# Altium PCB LCD TEST BOART-A8.PcbDoc (part 2 of 2)
Units mm, origin at the board's own origin, x right, y up, seen from the top; angles counter-clockwise.
Board outline 152.4 x 101.6 mm, 2 copper layers (Top Layer, Bottom Layer); 153 components, 128 nets, 620 pads, 196 vias.
Unrouted connection lines stored in the file: 57.
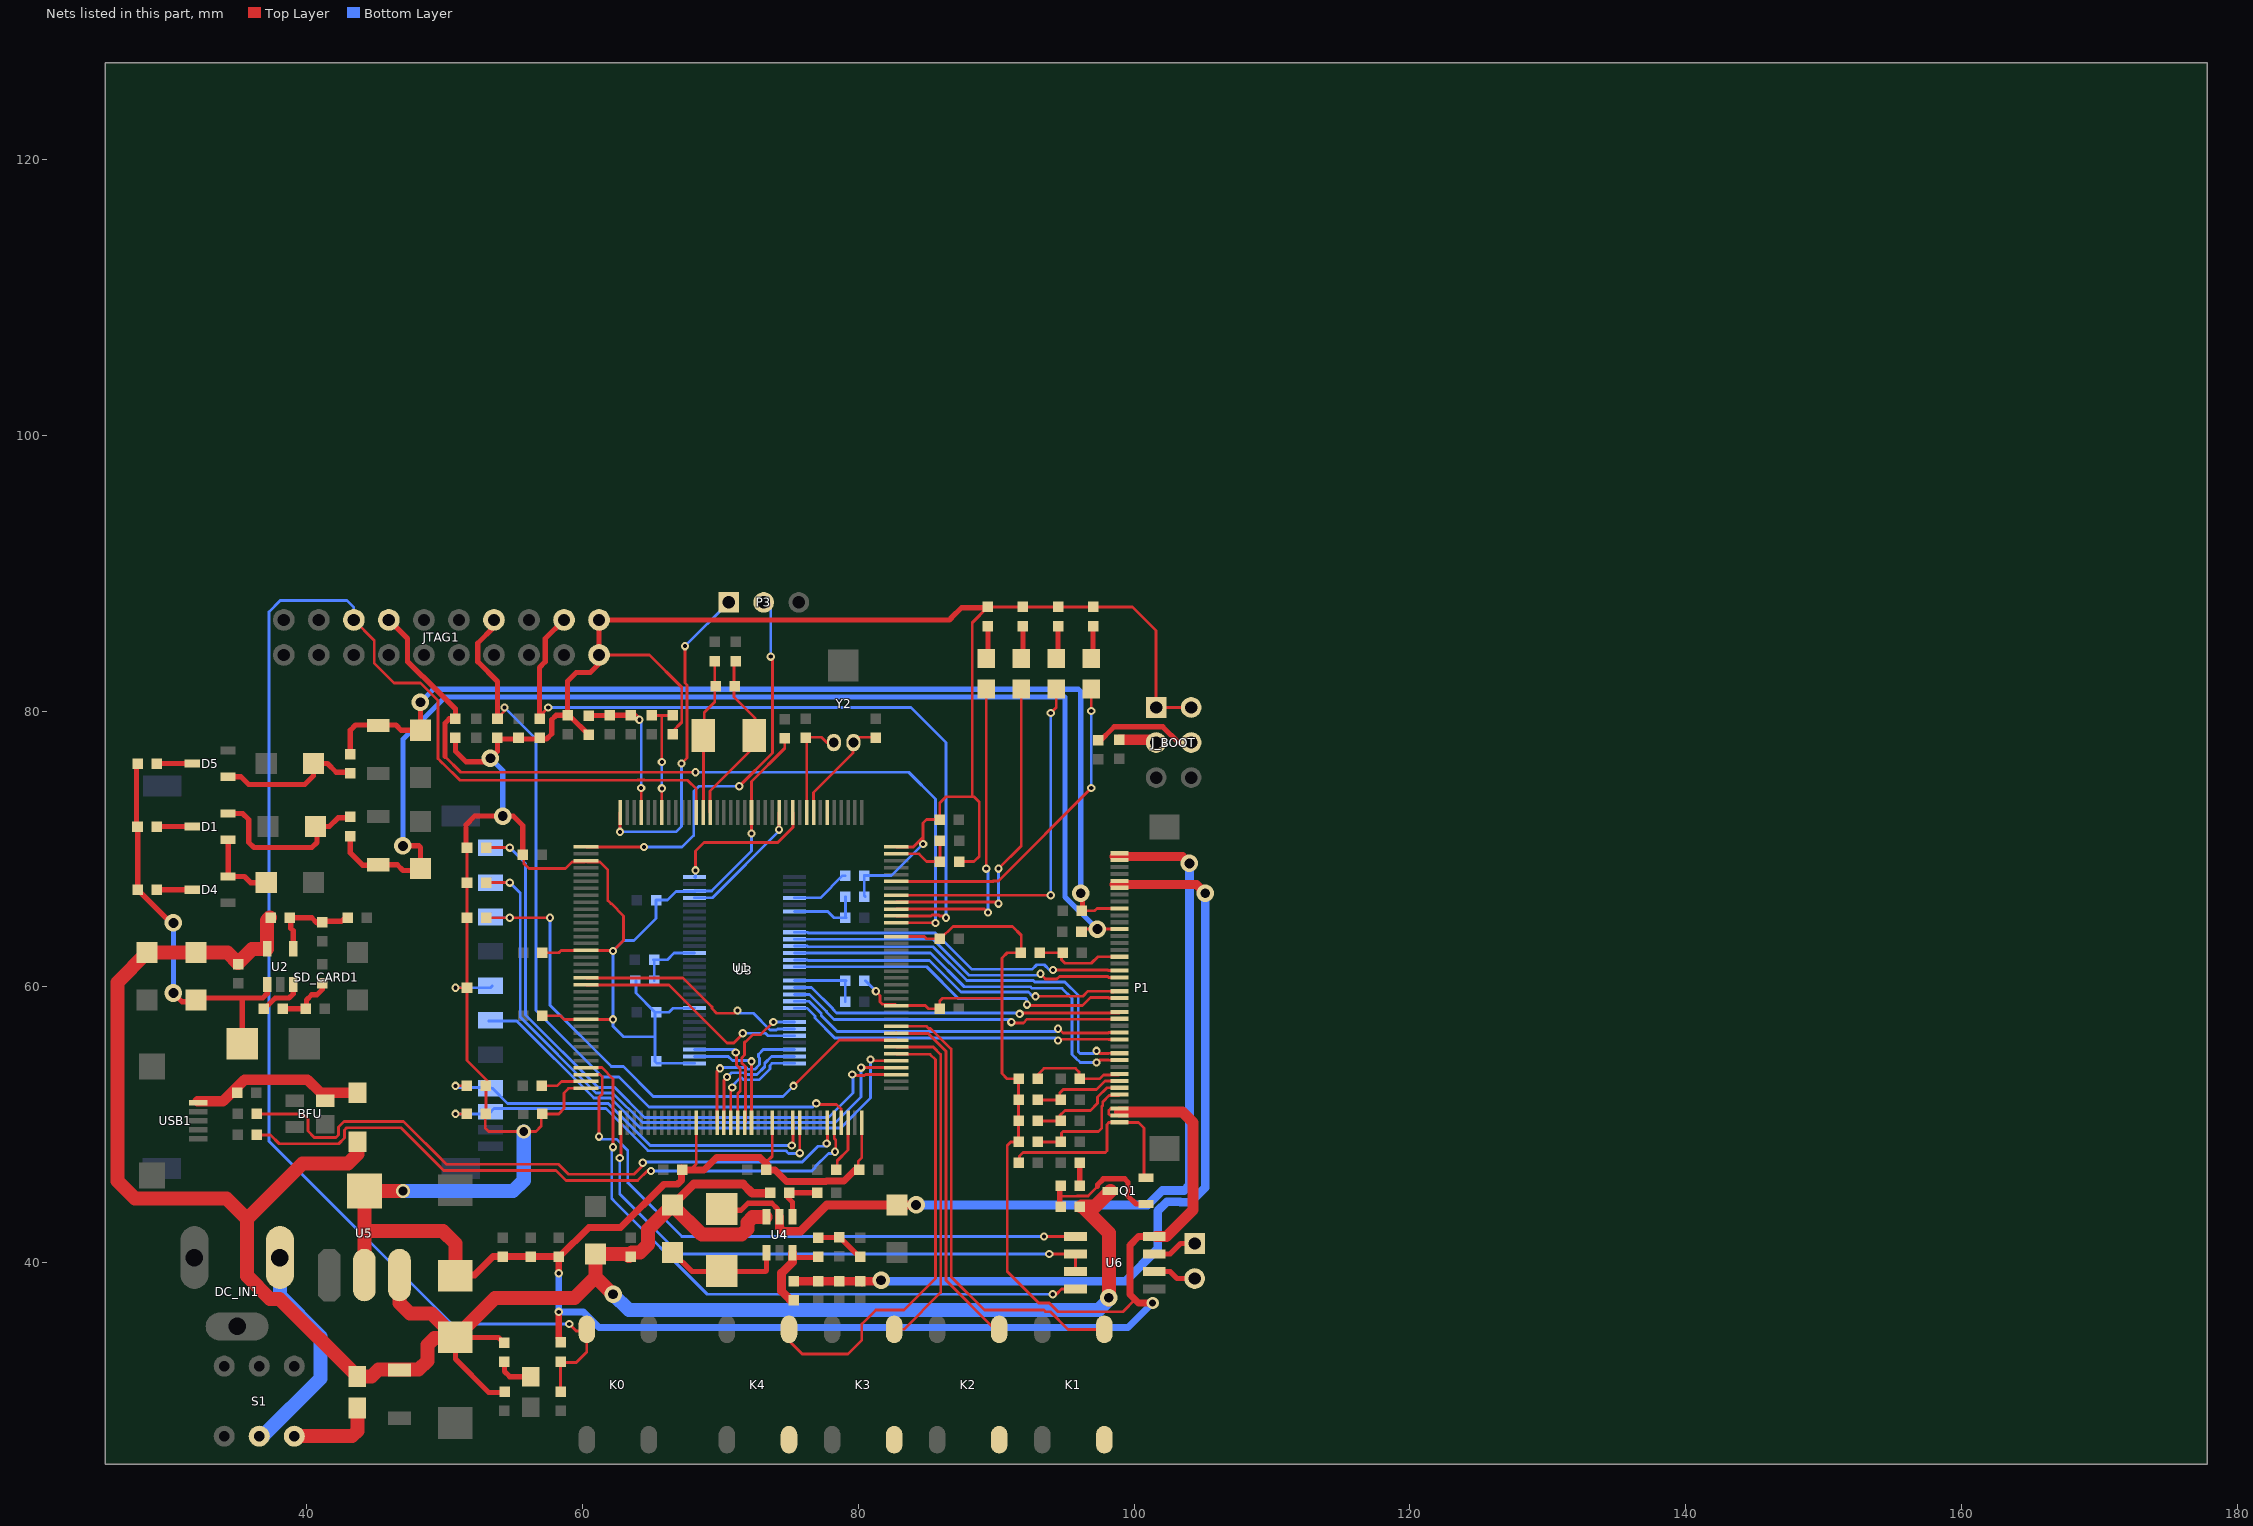
[diagram p2: the nets of this part, all layers, seen from the top]

## Via types
v1: diameter 0.6, hole 0.3, Top Layer to Bottom Layer, 177 vias
v2: diameter 1.27, hole 0.711, Top Layer to Bottom Layer, 14 vias
v3: diameter 0.8, hole 0.8, Top Layer to Bottom Layer, 2 vias
v4: diameter 1.016, hole 0.635, Top Layer to Bottom Layer, 2 vias
v5: diameter 0.889, hole 0.508, Top Layer to Bottom Layer, 1 vias

## Nets (pads, with @x,y where several pads share a name; then routed paths per layer and width w, separated by ;. In a path a pad name is that pad's centre, name@x,y a point inside that pad or via, vN(x,y) a via of type N, cw(c..) or ccw(c..) an arc to the next point about the centre after c; other vN are vias at no path point) (continued)
JTDO: JTAG1.13 R21.2 U1.133 | length 61.2
  Top Layer w0.203: 50.038,76.708 51.181,75.565 v1(68.199,75.565) ; U1.133@82.765,64.653 85.588,64.653 v1(85.598,64.643)
  Top Layer w0.381: JTAG1.13@45.974,86.614 47.333,85.255 47.333,83.585 48.406,82.512 48.455,82.512 50.802,80.165 R21.2@50.802,79.438 50.355,79.438 50.038,79.121 50.038,76.708
  Bottom Layer w0.203: v1(68.199,75.565) 83.662,75.565 85.598,73.629 v1(85.598,64.643)
JTMS: JTAG1.7 R20.2 U1.105 | length 58.4
  Top Layer w0.203: R20.2@53.848,79.502 53.85,79.504 54.356,80.01 v1(54.356,80.264) ; v1(76.962,51.562) 77.033,51.491 78.43,51.491 78.765,51.156 U1.105@78.765,50.153
  Top Layer w0.381: JTAG1.7@53.594,86.614 53.594,86.103 52.413,84.922 52.413,83.585 53.85,82.148 53.85,79.504 R20.2@53.85,79.438
  Bottom Layer w0.203: v1(54.356,80.264) 56.642,77.978 56.642,58.293 61.468,53.467 62.669,53.467 64.828,51.308 76.708,51.308 v1(76.962,51.562)
JTRST: JTAG1.3 R18.2 U1.134 | length 55
  Top Layer w0.203: R18.2@56.896,79.502 56.896,79.629 56.898,79.631 v1(57.531,80.264) ; U1.134@82.765,65.153 84.834,65.153 84.836,65.151 85.287,65.151 85.358,65.222 85.838,65.222 85.909,65.151 86.233,65.151 v1(86.36,65.024)
  Top Layer w0.381: R18.2@56.898,79.631 56.898,83.167 57.315,83.585 57.315,85.255 JTAG1.3@58.674,86.614
  Bottom Layer w0.203: v1(57.531,80.264) 83.82,80.264 86.36,77.724 86.36,73.406 86.36,73.279 v1(86.36,65.024)
KEY0: K1.2 U1.118 | length 33.9
  Top Layer w0.203: U1.118@82.765,57.153 84.949,57.153 85.103,56.999 85.241,56.999 86.741,55.499 86.741,38.989 89.154,36.576 93.472,36.576 93.591,36.457 93.941,36.457 95.22,35.178 K1.2@97.845,35.178
KEY1: K2.2 U1.117 | length 26
  Top Layer w0.203: U1.117@82.765,56.653 82.799,56.618 85.083,56.618 86.36,55.341 86.36,38.735 89.916,35.179 K2.2@90.17,35.179
KEY2: K3.2 U1.115 | length 25.1
  Top Layer w0.203: K3.2@82.677,35.179 83.312,35.179 85.979,37.846 85.979,55.118 85.444,55.653 U1.115@82.765,55.653
KEY3: K4.2 U1.114 | length 33.7
  Top Layer w0.203: K4.2@74.93,35.179 74.93,34.417 75.946,33.401 79.248,33.401 80.264,34.417 80.264,35.56 81.28,36.576 83.312,36.576 85.598,38.862 85.598,54.737 85.217,55.118 82.8,55.118 U1.114@82.765,55.153
L/R: P1.7 R28.1 R37.1 | length 6.9
  Top Layer w0.203: R28.1@92.964,51.816 R28.1@93.015,51.816 94.615,51.816 94.615,52.324 94.869,52.578 97.282,52.578 97.898,53.194 P1.7@98.959,53.194
LED0: DS1.2 U1.135 | length 22.8
  Top Layer w0.203: U1.135@82.765,65.653 89.16,65.653 v1(89.408,65.405) ; v1@89.279,68.582 DS1.2@89.279,81.609
  Bottom Layer w0.203: v1(89.408,65.405) v1@89.408,68.453
  other v1: 89.281,68.58
LED1: DS2.2 U1.136 | length 23.7
  Top Layer w0.203: U1.136@82.765,66.153 90.057,66.153 v1(90.17,66.04) ; v1(90.17,68.58) 91.819,70.229 DS2.2@91.819,81.609
  Bottom Layer w0.203: v1(90.17,66.04) v1(90.17,68.58)
LED2: DS3.2 U1.137 | length 26.4
  Top Layer w0.203: U1.137@82.765,66.653 v1(93.958,66.653) ; v1(93.958,79.861) 94.361,80.264 DS3.2@94.361,81.661
  Bottom Layer w0.203: v1(93.958,66.653) v1(93.958,79.861)
LED3: DS4.2 U1.139 | length 24.1
  Top Layer w0.203: U1.139@82.765,67.653 89.789,67.653 ; 89.789,67.691 90.17,67.691 v1(96.901,74.422) ; v1(96.899,80.012) DS4.2@96.899,81.609
  Bottom Layer w0.203: v1(96.899,80.012) 96.899,74.424 v1(96.901,74.422)
LED+: C44.1 D7.2 P1.39 P1.40 U4.5 | length 65
  Top Layer w0.381: D7.2@70.104,43.815 71.501,43.815 72.009,44.323 73.73,44.323 74.155,43.898 74.155,43.477 U4.5@74.295,43.337
  Top Layer w0.635: U4.5@74.295,43.337 74.295,42.545 74.548,42.292 75.82,42.292 77.724,44.196 C44.1@82.804,44.196 v2(84.201,44.196) ; 98.552,69.469 98.679,69.469 ; 98.959,69.469 103.505,69.469
  Bottom Layer w0.635: v2(84.201,44.196) 100.996,44.196 102.05,45.25 103.619,45.25 104.013,45.644 v2(104.013,68.961)
LED-: P1.35 P1.36 R49.2 R52.1 R53.1 R54.1 | length 62.2
  Top Layer w0.635: R49.2@75.313,38.672 R53.1@78.613,38.672 ; R53.1@78.613,38.659 R52.1@80.137,38.659 80.213,38.659 R52.1@80.264,38.608 ; R52.1@80.264,38.659 v2@81.585,38.659 ; 98.552,67.437 98.821,67.437 ; 98.959,67.437 104.521,67.437 v2(105.156,66.802)
  Bottom Layer w0.635: v2@81.724,38.672 99.377,38.672 101.725,41.019 101.725,43.775 102.387,44.437 103.323,44.437 ; 103.37,44.391 104.081,44.391 105.156,45.466 v2(105.156,66.802)
  other v2: 81.661,38.735
NetBFU_2: BFU.2 C52.2 D9.1 USB1.1 | length 12.6
  Top Layer w0.762: USB1.1@32.131,51.726 33.946,51.726 35.509,53.289 40.074,53.289 41.039,52.324 D9.1@43.688,52.324
NetC1_1: C1.1 U1.9 Y2.1 | length 7.7
  Top Layer w0.203: U1.9@76.265,72.653 76.265,78.04 76.2,78.105 77.343,78.105 77.724,77.724 Y2.1@78.232,77.724
NetC3_2: C3.2 R6.1 U1.24 Y1.1 | length 11.2
  Top Layer w0.203: U1.24@68.762,72.715 68.778,72.731 68.778,78.216 Y1.1@68.762,78.232 ; Y1.1@68.834,78.232 68.834,79.883 69.594,80.643 C3.2@69.594,83.629
NetC4_2: C4.2 R6.2 U1.23 Y1.2 | length 13.6
  Top Layer w0.203: U1.23@69.265,72.653 69.265,74.218 72.517,77.47 72.517,79.502 70.993,81.026 C4.2@70.993,83.439 ; Y1.2@72.462,77.415 Y1.2@72.462,78.232
NetC5_1: C5.1 U1.71 | length 3.3
  Top Layer w0.203: C5.1@57.074,52.832 58.166,52.832 58.487,53.153 U1.71@60.265,53.153
NetC6_1: C6.1 U1.106 | length 3.8
  Top Layer w0.203: C6.1@78.613,46.736 78.486,46.863 78.486,47.402 79.265,48.181 U1.106@79.265,50.153
NetC7_2: C7.2 C8.2 R8.1 U1.33 | length 10.8
  Top Layer w0.203: C7.2@63.5,79.756 63.881,79.756 64.135,79.502 v1(64.135,79.375) ; U1.33@64.265,72.653 v1(64.265,74.419)
  Top Layer w0.381: R8.1@60.452,79.68 C8.2@62.052,79.68 ; C8.2@61.978,79.692 C7.2@63.502,79.692 C7.2@63.563,79.692
  Bottom Layer w0.203: v1(64.135,79.375) 64.265,79.245 v1(64.265,74.419)
NetC24_1: C24.1 D1.2 R17.2 | length 12.8
  Top Layer w0.381: D1.2@34.32,72.578 35.372,72.578 35.814,72.136 35.814,70.485 36.195,70.104 40.386,70.104 40.767,70.485 C24.1@40.767,71.628 ; C24.1@40.64,71.755 C24.1@40.64,71.628 C24.1@40.767,71.628 ; C24.1@40.767,71.755 C24.1@40.767,71.628 ; R17.2@43.18,72.263 42.291,72.263 41.656,71.628 C24.1@40.767,71.628
NetC26_1: C26.1 D1.3 | length 2.6
  Top Layer w0.381: C26.1@29.134,71.628 D1.3@31.72,71.628 D1.3@31.75,71.628
NetC28_2: C28.2 L1.1 U3.34 | length 5.3
  Bottom Layer w0.203: U3.34@75.38,65.464 77.792,65.464 78.232,65.024 C28.2@78.994,65.024 ; L1.1@79.07,66.548 79.07,65.075 C28.2@79.121,65.024
NetC29_2: C29.2 L2.1 U3.44 | length 5.2
  Bottom Layer w0.203: U3.44@75.38,60.464 79.109,60.464 L2.1@79.121,60.452 ; C29.2@79.057,58.926 L2.1@79.057,60.389
NetC32_2: C32.2 D4.3 | length 2.6
  Top Layer w0.381: C32.2@29.146,67.054 31.748,67.054 D4.3@31.75,67.056
NetC33_1: C33.1 D1.1 D4.2 | length 5.6
  Top Layer w0.381: D1.1@34.29,70.612 34.32,70.582 D4.2@34.32,68.006 35.499,68.006 35.941,67.564 C33.1@37.084,67.564
NetC34_2: C34.2 R24.2 R32.2 U2.4 | length 6.9
  Top Layer w0.381: R24.2@38.798,65.022 R24.2@38.862,65.022 ; R24.2@38.862,65.024 R24.2@38.862,65.022 ; U2.4@39.05,62.768 39.05,64.074 38.862,64.262 R24.2@38.862,65.022 ; R32.2@43.053,65.024 42.799,65.024 42.545,64.77 41.148,64.77 41.021,64.643 40.767,64.643 40.388,65.022 R24.2@38.862,65.022
NetC37_2: C37.2 D5.1 R41.2 | length 10.5
  Top Layer w0.381: D5.1@34.32,75.25 35.24,75.25 35.814,74.676 39.878,74.676 40.513,75.311 C37.2@40.513,76.2 41.529,76.2 42.164,75.565 R41.2@43.18,75.565
NetC39_2: C39.2 D5.3 | length 2.6
  Top Layer w0.381: C39.2@29.146,76.198 31.748,76.198 D5.3@31.75,76.2
NetC51_2: C51.2 R55.1 R56.2 | length 3.8
  Top Layer w0.381: R55.1@77.089,41.834 78.689,41.834 80.137,40.386 R56.2@80.137,40.513
NetC53_1: C53.1 U1.8 Y2.2 | length 8.1
  Top Layer w0.203: U1.8@76.765,72.653 76.765,74.098 79.629,76.962 79.629,77.724 80.01,78.105 C53.1@81.28,78.105
NetD7_1: D7.1 L4.2 U4.1 | length 8.7
  Top Layer w0.381: L4.2@66.548,40.767 67.945,39.37 73.279,39.37 73.345,39.436 U4.1@73.345,40.737
NetDC_IN1_1: DC_IN1.1 S1.2 | length 16.2
  Bottom Layer w1.016: S1.2@36.576,27.432 36.83,27.432 41.021,31.623 41.021,34.671 38.077,37.615 DC_IN1.1@38.077,40.386
NetDS1_1: DS1.1 R12.2 | length 2.4
  Top Layer w0.381: DS1.1@89.281,83.82 89.406,83.945 R12.2@89.406,86.169
NetDS2_1: DS2.1 R14.2 | length 2.3
  Top Layer w0.381: DS2.1@91.694,83.947 91.946,84.199 R14.2@91.946,86.169
NetDS3_1: DS3.1 R15.2 | length 2.5
  Top Layer w0.381: DS3.1@94.234,83.82 94.486,84.072 R15.2@94.486,86.169
NetDS4_1: DS4.1 R16.2 | length 2.4
  Top Layer w0.381: DS4.1@96.901,83.82 97.026,83.945 R16.2@97.026,86.169
NetDS5_1: DS5.1 R60.2 | length 2.8
  Top Layer w0.381: R60.2@54.354,32.829 54.354,32.133 54.737,31.75 DS5.1@56.261,31.75
NetF1_1: F1.1 S1.3 | length 6.4
  Top Layer w1.016: S1.3@39.116,27.432 43.307,27.432 43.69,27.815 F1.1@43.69,29.464
NetJ_BOOT_3: J_BOOT.3 R43.2 | length 2.8
  Top Layer w0.762: R43.2@98.935,77.915 101.282,77.915 J_BOOT.3@101.6,77.597
NetJ_BOOT_4: J_BOOT.4 R44.1 | length 7.8
  Top Layer w0.381: R44.1@97.409,77.851 97.409,77.74 97.425,77.724 98.569,78.868 102.074,78.868 103.217,77.724 J_BOOT.4@104.14,77.724
NetP2_1: P2.1 U6.7 | length 3.2
  Top Layer w0.381: U6.7@101.473,40.64 102.616,40.64 103.378,41.402 P2.1@104.394,41.402
NetP2_2: P2.2 U6.6 | length 3.1
  Top Layer w0.381: U6.6@101.458,39.37 102.616,39.37 103.124,38.862 P2.2@104.394,38.862
NetQ1_1: Q1.1 R23.2 R26.1 | length 10.1
  Top Layer w0.203: 94.615,44.831 95.838,44.831 95.864,44.856 96.672,44.856 97.35,45.534
  Top Layer w0.381: R26.1@94.615,45.593 94.615,44.831 94.615,44.069 R23.2@94.805,43.878 ; R23.2@94.742,44.069 R23.2@94.818,44.145 ; 97.35,45.534 97.35,45.665 97.773,46.088 99.327,46.088 99.568,45.847 99.568,44.831 100.137,44.262 Q1.1@100.868,44.262
NetR10_1: R10.1 R11.1 U1.143 | length 4.9
  Top Layer w0.203: U1.143@82.765,69.653 84.398,69.653 84.963,69.088 R11.1@85.852,69.088 ; R11.1@85.928,69.037 R11.1@85.928,69.088 R10.1@85.928,70.612
NetR25_1: R25.1 R27.2 R33.2 | length 4.3
  Top Layer w0.381: R27.2@38.291,58.418 40.003,58.418 40.005,58.42 40.005,59.055 40.386,59.436 40.767,59.436 41.148,59.817 R25.1@41.148,60.274 R25.1@41.148,60.325
NetR26_2: R26.2 R34.1 | length 1.8
  Top Layer w0.381: R34.1@96.063,47.241 96.063,45.669 R26.2@96.139,45.593 ; R34.1@96.203,47.053 R34.1@96.266,47.117
NetR27_1: R27.1 U2.3 | length 3.2
  Top Layer w0.381: R27.1@36.957,58.42 37.719,59.182 37.735,59.182 37.746,59.193 38.735,59.193 39.05,59.508 U2.3@39.05,60.168
NetR47_2: R47.2 R50.2 U4.4 | length 4.1
  Top Layer w0.381: R47.2@74.93,45.085 74.93,44.704 75.245,44.389 U4.4@75.245,43.337 ; R47.2@74.993,45.083 R50.2@77.025,45.083 77.087,45.083 77.089,45.085 R50.2@76.962,45.085 ; U4.4@75.311,43.307 U4.4@75.311,43.337
NetR48_2: R48.2 R51.1 U3.17 | length 4.7
  Bottom Layer w0.203: R51.1@65.151,61.976 R51.1@65.202,61.976 R51.1@65.278,61.976 ; R48.2@65.215,60.454 65.215,61.912 R51.1@65.278,61.976 ; U3.17@68.13,62.464 66.655,62.464 66.167,61.976 R51.1@65.278,61.976
NetR49_1: R49.1 R55.2 U4.3 | length 6
  Top Layer w0.381: R49.1@75.097,37.338 75.224,37.211 R49.1@75.311,37.211 ; 75.596,40.386 R55.2@77.087,40.386
  Top Layer w0.635: U4.3@75.245,40.737 75.245,40.066 74.436,39.258 74.436,37.959 75.057,37.338 75.097,37.338 R49.1@75.311,37.338
NetR57_2: R57.2 U3.32 | length 4.3
  Bottom Layer w0.203: U3.32@75.38,66.464 77.259,66.464 78.865,68.07 R57.2@79.057,68.07
NRST: C40.2 JTAG1.15 K0.1@60.325,35.178 R36.1 U1.25 | length 116.5
  Top Layer w0.203: JTAG1.15@43.434,86.614 44.907,85.141 44.907,83.49 46.355,82.042 48.26,82.042 49.53,80.772 49.53,76.551 49.843,76.238 49.873,76.238 51.125,74.986 64.011,74.986 64.025,74.999 64.505,74.999 64.518,74.986 67.635,74.986 68.265,74.356 U1.25@68.265,72.653 ; C40.2@58.42,30.607 58.42,32.766 59.563,32.766 60.325,33.528 K0.1@60.325,35.052 ; v1(59.055,35.56) 59.563,35.052 K0.1@60.325,35.052 ; K0.1@59.817,35.56 K0.1@60.325,35.052 ; K0.1@60.325,35.178 K0.1@60.325,35.052
  Bottom Layer w0.203: JTAG1.15@43.434,86.614 43.434,87.503 42.926,88.011 38.1,88.011 37.287,87.198 37.287,87.056 37.287,48.819 50.546,35.56 v1(59.055,35.56)
PIN30: R45.2 R46.2 U1.30 | length 8.4
  Top Layer w0.203: R46.2@65.026,79.692 R45.2@66.484,79.692 ; U1.30@65.765,72.653 v1(65.765,74.401) ; v1(65.765,76.306) 65.765,79.608 65.786,79.629
  Bottom Layer w0.203: v1(65.765,74.401) v1(65.765,76.306)
R0: U1.56 U3.51 | length 17
  Top Layer w0.203: U1.56@60.265,60.653 67.306,60.653 69.398,58.561 69.398,58.434 69.737,58.095 71.049,58.095 v1(71.247,58.293)
  Bottom Layer w0.203: v1(71.247,58.293) 71.247,58.15 71.303,58.095 72.397,58.095 73.564,56.927 73.607,56.885 74.087,56.885 74.166,56.964 U3.51@75.38,56.964
R1: U1.57 U3.52 | length 17.3
  Top Layer w0.203: U1.57@60.265,60.153 66.282,60.153 70.499,55.936 70.979,55.936 71.628,56.585 v1(71.628,56.642)
  Bottom Layer w0.203: v1(71.628,56.642) 73.279,56.642 73.457,56.464 U3.52@75.38,56.464
R2: U1.87 U3.54 | length 10.6
  Top Layer w0.203: U1.87@69.765,50.153 69.765,53.89 v1(69.977,54.102)
  Bottom Layer w0.203: v1(69.977,54.102) 70.033,54.158 71.896,54.158 72.023,54.031 72.503,54.031 72.842,54.37 72.842,54.85 72.771,54.921 72.771,55.118 73.117,55.464 U3.54@75.38,55.464
R3: U1.88 U3.55 | length 9.2
  Top Layer w0.203: U1.88@70.265,50.153 70.265,53.247 v1(70.485,53.467)
  Bottom Layer w0.203: v1(70.485,53.467) 70.795,53.777 71.738,53.777 71.865,53.65 72.661,53.65 73.223,54.212 73.223,54.466 73.721,54.964 U3.55@75.38,54.964
R4: U1.89 U3.56 | length 8.1
  Top Layer w0.203: U1.89@70.765,50.153 70.765,52.604 v1(70.866,52.705)
  Bottom Layer w0.203: v1@70.802,52.768 71.43,53.396 71.58,53.396 71.707,53.269 72.819,53.269 73.604,54.054 73.604,54.308 73.76,54.464 U3.56@75.38,54.464
R5: U1.90 U3.3 | length 8.5
  Top Layer w0.203: v1(71.12,55.245) 71.12,55.372 71.176,55.316 71.176,54.339 71.445,54.069 71.445,52.465 71.265,52.284 U1.90@71.265,50.153
  Bottom Layer w0.203: U3.3@68.13,55.464 v1@71.028,55.464
R6: U1.91 U3.50 | length 10.3
  Top Layer w0.203: 71.755,56.007 71.765,56.007 ; U1.91@71.765,50.153 71.826,50.215 71.826,54.227 71.557,54.497 71.557,54.862 71.765,55.07 71.765,56.007 ; v1(73.847,57.464) 72.926,56.543 72.361,56.543 71.825,56.007 71.765,56.007
  Bottom Layer w0.203: v1(73.847,57.464) U3.50@75.38,57.464
R7: U1.92 U3.2 | length 8.7
  Top Layer w0.203: v1(72.263,54.61) 72.265,54.608 U1.92@72.265,50.153
  Bottom Layer w0.203: U3.2@68.13,54.964 70.582,54.964 70.88,54.666 72.207,54.666 v1(72.263,54.61)
RESET: C36.2 P1.5 R29.2 | length 8.8
  Top Layer w0.203: R29.2@92.964,48.768 94.742,48.768 94.742,49.403 94.869,49.53 97.409,49.53 97.663,49.784 97.663,51.347 97.733,51.417 97.733,51.663 98.193,52.123 98.888,52.123 P1.5@98.959,52.194
RS232_RX: P3.2 U1.37 | length 29.4
  Top Layer w0.203: U1.37@60.265,70.153 v1(64.467,70.153) ; v1(71.374,74.549) 73.787,76.962 73.787,83.82 v1(73.66,83.947)
  Bottom Layer w0.203: v1(64.467,70.153) 67.232,70.153 68.072,70.993 68.072,74.168 68.453,74.549 v1(71.374,74.549) ; P3.2@73.152,87.884 73.66,87.376 v1(73.66,83.947)
RS232_TX: P3.1 U1.36 | length 23.8
  Top Layer w0.203: v1(62.738,71.247) U1.36@62.738,72.644 ; v1(67.183,76.2) 67.591,76.608 67.591,81.888 67.437,82.042 v1(67.437,84.709)
  Bottom Layer w0.203: v1(62.738,71.247) 66.802,71.247 67.183,71.628 v1(67.183,76.2) ; v1(67.437,84.709) P3.1@70.612,87.884
RS485_RE: U1.73 U6.2 U6.3 | length 41.1
  Top Layer w0.203: v1(62.711,47.598) v1@62.711,47.625 ; v1@62.738,47.625 62.809,47.696 62.809,50.108 U1.73@62.765,50.153 ; v1(93.853,40.64) U6.2@95.758,40.64 U6.3@95.758,39.37
  Bottom Layer w0.203: v1@62.711,47.371 62.711,44.985 67.056,40.64 v1(93.853,40.64)
RS485_RX: U1.69 U6.4 | length 47.8
  Top Layer w0.203: U1.69@60.265,54.153 61.417,54.153 62.23,53.34 v1(62.23,48.387) v1@62.357,48.387 ; v1(94.107,37.719) 94.361,37.719 94.742,38.1 U6.4@95.758,38.1
  Bottom Layer w0.203: 62.215,44.562 69.057,37.719 v1(94.107,37.719) ; 62.23,44.577 62.132,44.675 62.132,48.289 v1(62.23,48.387)
RS485_TX: U1.70 U6.1 | length 44.6
  Top Layer w0.203: U1.70@60.265,53.653 61.282,53.653 61.468,53.467 61.444,53.443 61.444,52.247 61.214,52.017 v1(61.214,49.149) ; v1(93.472,41.91) U6.1@95.758,41.91
  Bottom Layer w0.203: v1(61.214,49.149) 61.397,48.966 62.47,48.966 63.29,48.146 63.29,47.498 63.29,47.358 63.29,45.803 63.373,45.72 ; 63.389,45.736 67.214,41.91 v1(93.472,41.91)
RSVD: U1.13 U3.25 | length 9.5
  Top Layer w0.203: v1(74.265,71.404) U1.13@74.265,72.653
  Bottom Layer w0.203: U3.25@68.13,66.464 69.416,66.464 74.295,71.343 v1@74.295,71.374 ; v1@74.265,71.374 v1(74.265,71.404)
RXCLKIN_N: P1.10 U3.40 | length 29.3
  Top Layer w0.203: v1(97.282,54.517) 97.48,54.715 98.15,54.715 98.171,54.694 P1.10@98.959,54.694
  Bottom Layer w0.203: U3.40@75.38,62.464 85.237,62.464 87.688,60.013 92.5,60.013 92.611,59.902 94.784,59.902 95.504,59.182 95.504,55.118 95.758,54.864 96.105,54.517 v1(97.282,54.517)
RXCLKIN_P: P1.11 U3.39 | length 29.3
  Top Layer w0.203: v1(97.282,55.371) 97.48,55.173 98.15,55.173 98.171,55.194 P1.11@98.959,55.194
  Bottom Layer w0.203: U3.39@75.38,62.964 76.327,62.964 76.37,62.921 85.426,62.921 87.877,60.47 92.689,60.47 92.801,60.359 94.974,60.359 95.961,59.371 95.961,55.307 96.081,55.187 97.098,55.187 v1(97.282,55.371)
RXIN0_N: P1.13 U3.48 | length 24.7
  Top Layer w0.203: v1(94.488,56.113) 94.59,56.215 98.15,56.215 98.171,56.194 P1.13@98.959,56.194
  Bottom Layer w0.203: U3.48@75.38,58.464 76.289,58.464 76.865,57.888 76.865,57.743 78.297,56.312 94.29,56.312 v1(94.488,56.113)
RXIN0_P: P1.14 U3.47 | length 24.8
  Top Layer w0.203: v1(94.488,56.967) 94.561,56.967 94.856,56.673 98.15,56.673 98.171,56.694 P1.14@98.959,56.694
  Bottom Layer w0.203: U3.47@75.38,58.964 76.436,58.964 77.323,58.077 77.323,57.932 78.486,56.769 94.29,56.769 v1(94.488,56.967)
RXIN1_N: P1.16 U3.46 | length 24.7
  Top Layer w0.203: v1(91.103,57.448) 91.155,57.397 91.979,57.397 92.248,57.666 98.931,57.666 P1.16@98.959,57.694
  Bottom Layer w0.203: U3.46@75.38,59.464 76.474,59.464 77.704,58.235 77.704,58.196 78.248,57.651 80.144,57.651 91.108,57.651 91.108,57.453 v1(91.103,57.448)
RXIN1_P: P1.17 U3.45 | length 24.4
  Top Layer w0.203: v1(91.707,58.052) 91.778,58.123 P1.17@98.933,58.123
  Bottom Layer w0.203: U3.45@75.38,59.964 76.621,59.964 78.161,58.424 78.161,58.385 78.438,58.108 80.333,58.108 91.453,58.108 91.509,58.052 v1(91.707,58.052)
RXIN2_N: P1.19 U3.42 | length 25.2
  Top Layer w0.203: v1(92.246,58.718) 92.298,58.667 96.27,58.667 96.843,59.24 98.125,59.24 98.171,59.194 P1.19@98.959,59.194
  Bottom Layer w0.203: U3.42@75.38,61.464 84.967,61.464 87.256,59.175 92.153,59.175 92.195,59.133 92.195,59.051 92.288,58.958 92.288,58.76 v1(92.246,58.718)
RXIN2_P: P1.20 U3.41 | length 25
  Top Layer w0.203: v1(92.85,59.322) 96.279,59.322 96.654,59.697 98.315,59.697 98.388,59.623 98.473,59.623 98.402,59.694 P1.20@98.959,59.694
  Bottom Layer w0.203: U3.41@75.38,61.964 76.327,61.964 76.37,61.921 85.156,61.921 87.445,59.632 92.342,59.632 92.652,59.322 v1(92.85,59.322)
RXIN3_N: P1.22 U3.38 | length 25
  Top Layer w0.203: v1(93.218,60.96) 93.218,60.922 93.568,60.572 94.392,60.572 94.59,60.77 98.095,60.77 98.171,60.694 P1.22@98.959,60.694
  Bottom Layer w0.203: U3.38@75.38,63.464 85.422,63.464 88.035,60.851 93.109,60.851 v1(93.218,60.96)
RXIN3_P: P1.23 U3.37 | length 25
  Top Layer w0.203: v1(94.12,61.227) 98.095,61.227 98.15,61.173 98.171,61.194 P1.23@98.959,61.194
  Bottom Layer w0.203: U3.37@75.38,63.964 76.327,63.964 76.37,63.921 85.612,63.921 88.254,61.279 92.61,61.279 92.946,61.616 93.49,61.616 93.878,61.227 v1(94.12,61.227)
SDIO_CMD: R3.2 SD_CARD1.2 U1.116 | length 41.9
  Top Layer w0.203: R3.2@53.023,65.022 v1(54.735,65.022) ; v1@54.737,65.024 v1(57.658,65.024) ; v1(75.311,52.832) 78.632,56.153 U1.116@82.765,56.153
  Bottom Layer w0.203: SD_CARD1.2@53.34,65.024 54.734,65.024 v1(54.735,65.022) ; v1(57.658,65.024) 57.658,58.674 62.103,54.229 62.985,54.229 65.144,52.07 74.549,52.07 v1(75.311,52.832)
SDIO_D0: R4.2 SD_CARD1.7 U1.98 | length 28.8
  Top Layer w0.203: v1(50.802,52.834) R4.2@51.625,52.834 ; v1(75.184,48.514) 75.311,48.514 75.265,48.56 U1.98@75.265,50.153
  Bottom Layer w0.203: v1(50.802,52.834) 50.93,52.705 SD_CARD1.7@53.34,52.705 ; SD_CARD1.7@53.331,52.656 53.482,52.656 54.576,51.562 59.628,51.562 61.88,51.562 64.928,48.514 v1(75.184,48.514)
SDIO_D1: R5.2 SD_CARD1.8 U1.99 | length 29.5
  Top Layer w0.203: v1(50.802,50.802) R5.2@51.625,50.802 ; v1(75.765,47.952) U1.99@75.765,50.153
  Bottom Layer w0.203: v1(50.802,50.802) 53.215,50.802 53.594,51.181 60.356,51.181 60.452,51.181 61.722,51.181 64.77,48.133 74.746,48.133 74.944,47.935 75.748,47.935 v1(75.765,47.952)
SDIO_D2: R1.2 SD_CARD1.9 U1.111 | length 47.9
  Top Layer w0.203: R1.2@53.023,70.102 54.735,70.102 v1(54.737,70.104) ; v1(79.57,53.653) 79.649,53.574 80.453,53.574 80.532,53.653 U1.111@82.765,53.653
  Bottom Layer w0.203: SD_CARD1.9@53.34,70.104 v1(54.737,70.104) 55.88,68.961 55.88,57.977 61.152,52.705 62.353,52.705 64.512,50.546 77.851,50.546 79.629,52.324 v1@79.629,53.594 ; v1@79.57,53.594 v1(79.57,53.653)
SDIO_D3: R2.2 SD_CARD1.1 U1.112 | length 46.4
  Top Layer w0.203: R2.2@53.086,67.564 v1(54.737,67.564) ; v1(80.213,54.153) U1.112@82.765,54.153
  Bottom Layer w0.203: SD_CARD1.1@53.34,67.564 v1(54.737,67.564) 55.499,66.802 55.499,57.82 60.995,52.324 62.195,52.324 64.354,50.165 78.359,50.165 80.213,52.019 v1(80.213,54.153)
SDIO_SCK: SD_CARD1.5 U1.113 | length 36.5
  Top Layer w0.203: v1(80.899,54.737) 80.983,54.653 U1.113@82.765,54.653
  Bottom Layer w0.203: SD_CARD1.5@53.213,57.531 55.245,57.531 60.833,51.943 62.038,51.943 64.197,49.784 78.74,49.784 80.899,51.943 v1(80.899,54.737)
SELB: P1.25 R40.2 R42.1 | length 6.7
  Top Layer w0.203: R40.2@93.154,62.482 R42.1@94.742,62.482 ; R42.1@94.742,62.484 R42.1@94.742,62.482 ; R42.1@94.869,62.484 94.867,62.482 R42.1@94.742,62.482 ; P1.25@98.959,62.194 97.373,62.194 96.901,61.722 94.996,61.722 94.742,61.976 R42.1@94.742,62.482
STBYB: P1.8 R31.1 R39.2 | length 7.2
  Top Layer w0.203: R31.1@93.091,53.34 92.964,53.467 92.964,53.594 93.472,54.102 95.758,54.102 96.012,53.848 96.012,53.402 R39.2@96.075,53.338 ; R39.2@96.139,53.34 97.505,53.34 97.789,53.623 98.888,53.623 P1.8@98.959,53.694
SW: C26.2 C32.1 C39.1 D3.1 L3.2 U2.1 | length 29.1
  Top Layer w0.381: C39.1@27.686,76.2 27.686,71.628 27.762,71.552 C32.1@27.762,67.056 30.175,64.643 v2(30.353,64.643) ; v2(30.353,59.563) 30.988,58.928 31.877,58.928 L3.2@32.004,59.055 32.144,59.195 36.83,59.195 37.15,59.515 U2.1@37.15,60.168 ; 35.306,59.182 35.342,59.146 D3.1@35.342,55.88
  Bottom Layer w0.381: v2(30.353,59.563) v2(30.353,64.643)
U/D: P1.6 R30.2 R38.1 | length 7.4
  Top Layer w0.203: R30.2@93.091,50.292 R38.1@94.615,50.292 ; R38.1@94.691,50.292 R38.1@94.615,50.292 ; P1.6@98.959,52.694 98.033,52.694 97.352,52.013 97.352,51.574 96.831,51.054 94.996,51.054 94.615,50.673 R38.1@94.615,50.292
USB_D_N: R58.2 U1.103 | length 47.6
  Top Layer w0.203: R58.2@36.386,50.798 39.731,50.798 40.113,50.416 40.113,49.55 40.568,49.096 42.15,49.096 42.313,49.259 42.313,49.835 42.733,50.255 47.039,50.255 50.143,47.151 58.271,47.151 58.997,46.424 63.741,46.424 64.376,47.059 v1(64.376,47.257) ; v1(77.711,48.654) 77.765,48.708 U1.103@77.765,50.153
  Bottom Layer w0.203: v1(64.376,47.257) 64.427,47.309 75.941,47.309 77.088,48.456 77.711,48.456 v1(77.711,48.654)
USB_D_P: R59.2 U1.104 | length 47.5
  Top Layer w0.203: R59.2@36.386,49.274 37.392,49.274 38.028,48.638 42.339,48.638 42.759,49.058 42.759,49.634 42.922,49.797 46.85,49.797 49.954,46.693 58.082,46.693 58.808,45.967 64.013,45.967 64.74,46.695 64.938,46.695 v1(64.98,46.653) ; U1.104@78.265,50.153 78.265,49.028 78.366,48.926 78.366,48.383
  Bottom Layer w0.203: v1(64.98,46.653) 76.637,46.653 76.891,46.907 76.891,46.976 77.851,47.937 78.29,47.937 78.359,48.006 v1@78.359,48.133
  other v1: 78.315,48.05
VBAT: U1.6
VCC5V: C30.1 C31.2 C42.1 C43.2 C45.1 C47.2 D8.2 D9.2 F1.2 L3.1 L4.1 Q1.3 R23.1 R24.1 R47.1 R60.1 U2.5 U4.6 U5.3 | length 178.5
  Top Layer w0.381: C47.2@54.356,30.607 53.213,30.607 50.8,33.02 50.8,34.544 C45.1@50.8,34.596 53.923,34.596 R60.1@54.356,34.163
  Top Layer w0.635: L4.1@66.548,44.196 68.072,45.72 71.646,45.72 72.315,45.052 73.576,45.052 R47.1@73.609,45.085 R47.1@73.66,45.085
  Top Layer w1.016: U2.5@37.084,62.738 36.068,62.738 35.052,61.722 34.29,62.484 C30.1@28.448,62.484 26.289,60.325 26.289,45.948 27.556,44.681 34.186,44.681 35.687,43.18 ; U2.5@37.15,62.768 37.15,64.836 R24.1@37.338,65.024 ; D9.2@43.688,48.768 43.688,47.879 43.001,47.192 39.699,47.192 35.687,43.18 ; U5.3@46.736,39.116 46.736,37.084 47.498,36.322 49.074,36.322 C45.1@50.8,34.596 53.669,37.465 59.436,37.465 60.96,38.989 ; C45.1@50.8,34.544 49.276,34.544 48.768,34.036 48.768,32.893 48.133,32.258 45.212,32.258 44.704,31.75 F1.2@43.69,31.75 38.051,37.389 37.362,37.389 35.687,39.063 35.687,43.18 ; v2(62.23,37.719) 60.96,38.989 ; U4.6@73.279,43.307 72.351,43.307 71.965,42.922 71.965,42.461 71.549,42.045 68.659,42.045 66.548,44.156 L4.1@66.548,44.196 64.77,42.418 64.77,41.336 64.176,40.742 63.602,40.742 63.373,40.513 63.373,40.64 C42.1@60.96,40.64 60.96,38.989 ; R23.1@96.19,44.069 R23.1@96.266,44.069 ; v2(98.171,37.465) 98.171,37.338 98.171,42.164 R23.1@96.266,44.069 ; Q1.3@98.298,45.212 97.155,44.069 R23.1@96.266,44.069
  Bottom Layer w1.016: v2(62.23,37.719) 63.373,36.576 97.409,36.576 98.171,37.338 v2(98.171,37.465)
VCOM: P1.1 Q1.2 R35.1 | length 15.5
  Top Layer w0.203: R35.1@91.694,47.244 91.694,47.752 91.948,48.006 97.917,48.006 98.044,48.133 98.044,50.038 98.2,50.194 P1.1@98.959,50.194 ; P1.1@98.933,50.165 100.33,50.165 100.711,49.784 100.711,46.319 Q1.2@100.868,46.162
VDD: C2.1 C9.2 C10.2 C11.2 C12.2 C13.2 C14.2 C15.2 C16.2 C17.2 C18.2 C19.2 C20.2 C21.2 C22.2 C23.2 C46.1 C48.2 C49.2 C50.2 J_BOOT.1 J_BOOT.2 JTAG1.1 JTAG1.2 L1.2 L2.2 P1.2 P1.3 R1.1 R2.1 R3.1 R4.1 R5.1 R8.2 R11.2 R12.1 R14.1 R15.1 R16.1 R18.1 R19.1 R20.1 R21.1 R28.2 R29.1 R30.1 R31.2 R36.2 R40.1 R45.1 R48.1 R57.1 SD_CARD1.4 U1.17 U1.39 U1.52 U1.62 U1.72 U1.84 U1.95 U1.108 U1.121 U1.131 U1.144 U3.1 U3.9 U3.26 U5.2 U5.4 U6.8 | length 447.5
  Top Layer w0.203: v1(50.8,59.944) C2.1@51.638,59.944 ; R2.1@51.562,67.564 51.638,67.488 R3.1@51.638,65.024 ; R1.1@51.562,70.104 51.638,70.028 R2.1@51.638,67.564 ; R3.1@51.689,65.024 51.638,64.973 C2.1@51.638,59.944 ; R5.1@52.959,50.8 52.959,49.784 53.213,49.53 v4(55.753,49.53) 56.642,49.53 57.023,49.911 57.023,50.798 57.023,50.8 58.293,50.8 58.674,51.181 58.674,52.324 59.003,52.653 U1.72@60.265,52.653 ; R5.1@53.01,50.8 R4.1@53.01,52.832 ; R4.1@53.086,52.705 53.086,53.213 51.638,54.661 C2.1@51.638,59.944 ; C11.2@55.753,69.596 55.753,68.961 56.134,68.58 58.77,68.58 59.249,69.059 60.171,69.059 U1.39@60.265,69.153 60.358,69.059 61.28,69.059 61.849,68.491 61.849,66.263 62.072,66.04 62.103,66.04 62.992,65.151 62.992,63.373 v1(62.23,62.611) 62.188,62.653 U1.52@60.265,62.653 58.462,62.653 58.293,62.484 C12.2@57.023,62.484 ; C13.2@57.023,57.912 58.42,57.912 58.679,57.653 U1.62@60.265,57.653 v1(62.225,57.653) ; JTAG1.2@61.214,84.074 64.866,84.074 67.21,81.73 67.21,79.196 66.548,78.534 R45.1@66.548,78.308 ; C15.2@67.183,46.736 67.818,46.736 68.265,47.183 U1.84@68.265,50.153 ; v1(72.263,71.12) 72.263,72.651 U1.17@72.265,72.653 72.265,74.901 74.676,77.312 C9.2@74.676,77.978 ; C16.2@73.406,46.736 73.406,47.117 73.406,47.371 73.765,47.73 U1.95@73.765,50.153 ; C17.2@80.01,46.736 80.01,47.371 80.265,47.626 U1.108@80.265,50.153 ; v1(81.28,59.69) 81.585,59.385 81.585,58.91 81.749,58.747 82.671,58.747 U1.121@82.765,58.653 84.857,58.653 85.09,58.42 C18.2@85.979,58.42 ; U1.131@82.765,63.653 84.81,63.653 84.963,63.5 C19.2@85.852,63.5 ; U1.144@82.765,70.153 83.996,70.153 84.709,70.866 ; v1(84.709,70.358) 84.709,70.866 ; C18.2@85.915,58.422 85.915,58.991 86.106,59.182 90.424,59.182 ; C19.2@85.915,63.502 85.981,63.502 86.868,64.389 91.186,64.389 91.821,63.754 91.821,62.484 R40.1@91.77,62.484 90.805,62.484 90.424,62.103 90.424,59.182 ; C20.2@85.915,72.138 85.915,73.343 86.36,73.787 88.392,73.787 88.773,73.406 88.773,69.469 88.392,69.088 R11.2@87.249,69.088 ; C20.2@85.979,72.136 84.963,72.136 84.709,71.882 84.709,70.866 ; 88.265,73.914 88.265,86.411 89.357,87.503 R12.1@89.408,87.554 R14.1@91.948,87.554 R15.1@94.488,87.554 R16.1@97.028,87.554 99.898,87.554 101.6,85.852 J_BOOT.1@101.6,80.264 J_BOOT.2@104.14,80.264 ; 90.678,53.467 90.424,53.721 90.424,53.724 ; R29.1@91.643,48.768 R29.1@91.63,48.768 ; R29.1@91.694,48.641 91.63,48.704 R29.1@91.63,48.768 ; P1.2@98.933,50.673 98.298,50.673 98.171,50.8 98.171,51.054 98.311,51.194 P1.3@98.959,51.194 ; 100.076,37.338 99.195,36.457 94.48,36.457 93.853,37.084 93.091,37.084 90.805,39.37 90.805,48.514 91.059,48.768 R29.1@91.63,48.768 ; 90.424,53.724 90.424,59.182 ; 90.424,53.724 90.807,53.342 R31.2@91.63,53.342 R28.2@91.63,51.818 R29.1@91.63,48.768
  Top Layer w0.381: R21.1@50.8,78.105 R21.1@50.8,78.054 50.8,77.089 51.562,76.327 53.086,76.327 v2(53.34,76.581) 53.848,77.089 53.848,77.978 57.404,77.978 57.785,78.359 57.785,79.375 58.102,79.692 C10.2@58.928,79.692 ; R1.1@51.562,70.104 51.562,71.755 52.197,72.39 v2(54.229,72.39) 54.991,72.39 55.689,71.691 C11.2@55.689,69.598 ; C10.2@58.93,79.692 C10.2@58.928,79.692 ; R8.2@60.45,78.295 59.117,79.629 58.928,79.629 C10.2@58.928,79.692 ; R12.1@89.408,87.503 89.357,87.503 87.503,87.503 86.741,86.741 86.614,86.614 JTAG1.1@61.214,86.614 JTAG1.2@61.214,84.074 61.214,83.439 60.579,82.804 59.563,82.804 58.928,82.169 C10.2@58.928,79.692
  Top Layer w0.5: C46.1@50.8,39.116 52.197,39.116 53.53,40.45 C50.2@54.227,40.45 C49.2@56.259,40.45 C48.2@58.291,40.45 ; v1(58.291,36.447) 58.291,34.546 R36.2@58.547,34.29 ; v1(58.291,39.245) C48.2@58.291,40.45 ; C15.2@67.183,46.863 67.183,46.736 67.183,45.974 66.908,45.699 65.922,45.699 62.768,42.545 62.726,42.545 62.709,42.562 60.469,42.562 58.356,40.45 C48.2@58.291,40.45 ; C15.2@67.246,46.734 68.832,46.734 69.723,47.625 72.898,47.625 73.406,47.117 ; C16.2@73.343,46.734 73.961,46.734 74.803,45.892 77.679,45.892 ; 77.724,45.927 78.968,45.927 79.777,46.736 80.01,46.736 C17.2@80.137,46.736 ; v5@101.473,37.084 100.33,37.084 100.076,37.338 99.695,37.719 99.695,41.275 100.33,41.91 U6.8@101.458,41.91 U6.8@101.6,41.91
  Top Layer w0.8: 98.933,50.927 103.505,50.927 104.267,50.165 104.267,43.815 102.362,41.91 U6.8@101.6,41.91
  Top Layer w1.016: U5.2@44.197,39.114 44.197,42.291 ; U5.4@44.197,45.21 v4(46.992,45.21) ; U5.4@44.197,45.338 44.197,42.291 ; C46.1@50.8,39.064 50.8,39.116 50.8,41.402 49.911,42.291 44.197,42.291
  Bottom Layer w0.203: v1(50.8,59.944) 53.34,59.944 SD_CARD1.4@53.467,60.071 ; v1(62.225,57.653) v1@62.23,57.658 ; R48.1@63.881,60.452 63.881,59.563 65.278,58.166 65.278,56.388 ; C22.2@65.341,58.168 66.296,58.168 66.592,58.464 U3.9@68.13,58.464 ; U3.1@68.13,54.464 65.424,54.464 65.278,54.61 65.278,56.388 ; U3.26@68.13,66.964 69.377,66.964 72.263,69.85 v1(72.263,71.12) ; U3.26@68.199,66.929 66.802,66.929 66.169,66.296 C21.2@65.341,66.296 65.341,64.96 63.754,63.373 62.992,63.373 v1(62.23,62.611) v1@62.23,57.658 ; L2.2@80.518,60.452 v1(81.28,59.69) ; L1.2@80.518,66.548 80.442,66.624 R57.1@80.442,68.072 82.423,68.072 v1(84.709,70.358) ; v1@62.23,57.658 62.23,57.15 62.992,56.388 65.278,56.388
  Bottom Layer w0.381: v2(53.34,76.581) 54.229,75.692 v2(54.229,72.39)
  Bottom Layer w0.5: v1(58.291,39.245) v1(58.291,36.447) 60.073,36.447 61.214,35.306 99.568,35.306 v5(101.346,37.084)
  Bottom Layer w1.016: v4(46.992,45.21) 54.989,45.21 55.753,45.974 v4(55.753,49.53)
VGH: C25.1 C27.1 D2.2 P1.29 R17.1 | length 87.3
  Top Layer w0.203: C27.1@96.139,64.008 96.325,64.194 v2(97.341,64.194) P1.29@98.959,64.194
  Top Layer w0.381: R17.1@43.18,70.942 43.18,69.723 44.069,68.834 D2.2@45.212,68.834 ; D2.2@45.212,68.862 46.581,68.862 46.99,68.453 48.133,68.453 C25.1@48.26,68.58 ; v2(46.99,70.231) 48.133,70.231 48.26,70.104 C25.1@48.26,68.707
  Bottom Layer w0.381: v2(46.99,70.231) 46.99,77.956 50.06,81.026 94.996,81.026 94.996,66.526 97.328,64.194 v2(97.341,64.194)
VGL: C38.2 C41.2 D6.1 P1.32 R41.1 | length 76.4
  Top Layer w0.203: C41.2@96.266,65.532 97.155,65.532 97.317,65.694 P1.32@98.959,65.694
  Top Layer w0.381: R41.1@43.18,76.886 43.18,78.613 43.561,78.994 46.482,78.994 46.863,78.613 C38.2@48.26,78.613 ; v2(48.26,80.645) C38.2@48.26,78.613 ; C38.2@48.387,78.486 C38.2@48.26,78.613 ; v2(96.139,66.802) 96.266,66.675 C41.2@96.266,65.532
  Bottom Layer w0.381: v2(48.26,80.645) 49.2,81.585 95.961,81.585 96.139,81.407 v2(96.139,66.802)
VSYNC: U1.11 U3.28 | length 10.8
  Top Layer w0.203: v1(68.199,68.453) 68.199,69.85 68.834,70.485 74.165,70.485 75.265,71.585 U1.11@75.265,72.653
  Bottom Layer w0.203: U3.28@68.13,67.964 U3.28@68.199,67.964 ; U3.28@68.199,67.945 U3.28@68.199,67.964 ; v1(68.199,68.453) U3.28@68.199,67.964
pads on no net: JTAG1.11 JTAG1.17 JTAG1.19 K0.1@60.325,27.178 P1.4 P1.30 P1.31 P1.34 P1.37 P1.38 P1.41 P1.42 S1.1 S1.4 S1.5 S1.6 SD_CARD1.10 SD_CARD1.11 SD_CARD1.12 U1.7 U1.15 U1.19 U1.20 U1.21 U1.22 U1.26 U1.27 U1.28 U1.29 U1.32 U1.34 U1.35 U1.40 U1.41 U1.42 U1.43 U1.44 U1.45 U1.46 U1.47 U1.49 U1.50 U1.53 U1.54 U1.55 U1.59 U1.60 U1.63 U1.64 U1.65 U1.66 U1.67 U1.68 U1.74 U1.75 U1.76 U1.77 U1.78 U1.79 U1.80 U1.81 U1.82 U1.85 U1.86 U1.96 U1.97 U1.100 U1.101 U1.102 U1.122 U1.123 U1.140 USB1. Y2.
copper on no net:
  other v3: 30.951,48.292 30.951,52.292

## Silkscreen, mask and mechanical layers (free items; w line width, h text height)
Mechanical 1:
  lines w0.254: 23.876,27.046 24.384,25.522 ; 23.876,73.998 24.384,75.522 ; 23.876,77.046 24.384,75.522 ; 23.876,123.998 24.384,125.522 ; 24.13,25.522 24.638,25.522 ; 24.13,125.522 24.638,125.522 ; 24.384,45.418 24.384,25.522 ; 24.384,55.626 24.384,75.522 ; 24.384,95.418 24.384,75.522 ; 24.384,105.626 24.384,125.522 ; 24.892,27.046 24.384,25.522 ; 24.892,73.998 24.384,75.522 ; 24.892,77.046 24.384,75.522 ; 24.892,123.998 24.384,125.522 ; 25.443,24.384 25.443,24.892 ; 26.967,24.13 25.443,24.638 ; 26.967,25.146 25.443,24.638 ; 45.339,24.638 25.443,24.638 ; 55.547,24.638 75.443,24.638 ; 73.919,24.13 75.443,24.638 ; 73.919,25.146 75.443,24.638 ; 75.443,24.384 75.443,24.892 ; 75.481,24.384 75.481,24.892 ; 77.005,24.13 75.481,24.638 ; 77.005,25.146 75.481,24.638 ; 95.377,24.638 75.481,24.638 ; 105.585,24.638 125.481,24.638 ; 123.957,24.13 125.481,24.638 ; 123.957,25.146 125.481,24.638 ; 125.481,24.384 125.481,24.892 ; 24.13,75.522 24.638,75.522 24.13,75.522 ; 25.4,25.527 25.4,89.535 105.918,89.535 105.918,25.527 25.4,25.527
  text "50 (mm)" at 25.298,95.672 h1.52 r90
  text "50 (mm)" at 25.298,45.672 h1.52 r90
  text "50 (mm)" at 45.593,23.724 h1.52
  text "50 (mm)" at 95.631,23.724 h1.52

## Text inside footprints (layer, text, board x,y; h text height)
BFU: Top Overlay "4" at 38.989,50.546 h0.51 r90; Top Overlay "1" at 41.929,49.079 h0.51 r90; Top Overlay "2" at 41.656,52.197 h0.51 r90; Top Overlay "3" at 39.751,50.673 h0.51 r90
C45: Mechanical 1 "C1" at 50.35,32.033 h0.51 r270
C46: Mechanical 1 "C1" at 51.25,41.627 h0.51 r90
D1: Mechanical 1 "U1" at 32.66,72.042 h0.51 r270
D4: Mechanical 1 "U1" at 32.66,67.47 h0.51 r270
D5: Mechanical 1 "U1" at 32.66,76.614 h0.51 r270
P1: Top Overlay "1" at 97.859,49.944 h0.51 r90; Top Overlay "40" at 97.859,68.594 h0.51 r90
Q1: Mechanical 1 "U1" at 99.208,45.626 h0.6 r270
U2: Mechanical 15 "1" at 38.264,61.918 h0.51 r180
U4: Mechanical 15 "1" at 74.459,42.487 h0.51 r180